# EAGLE board LRC-prod (EAGLE 5.11), part 1 of 2
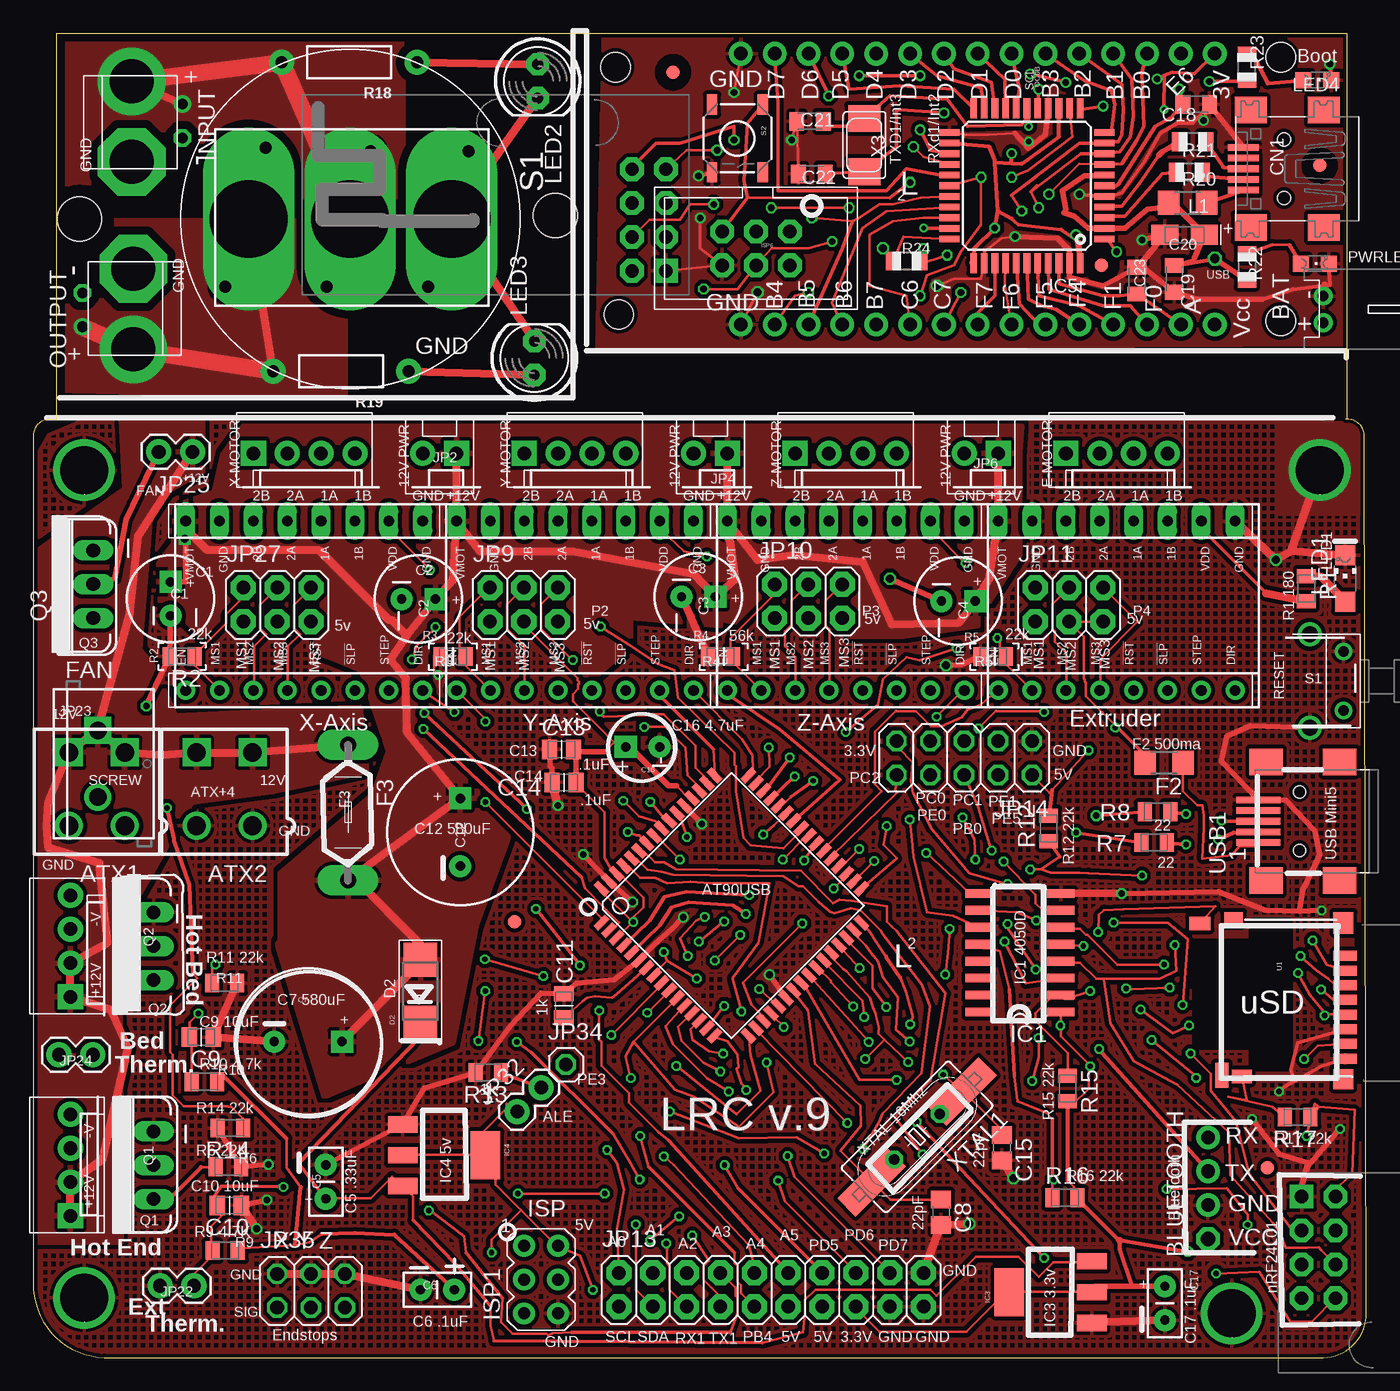
[diagram p0: board, top side]
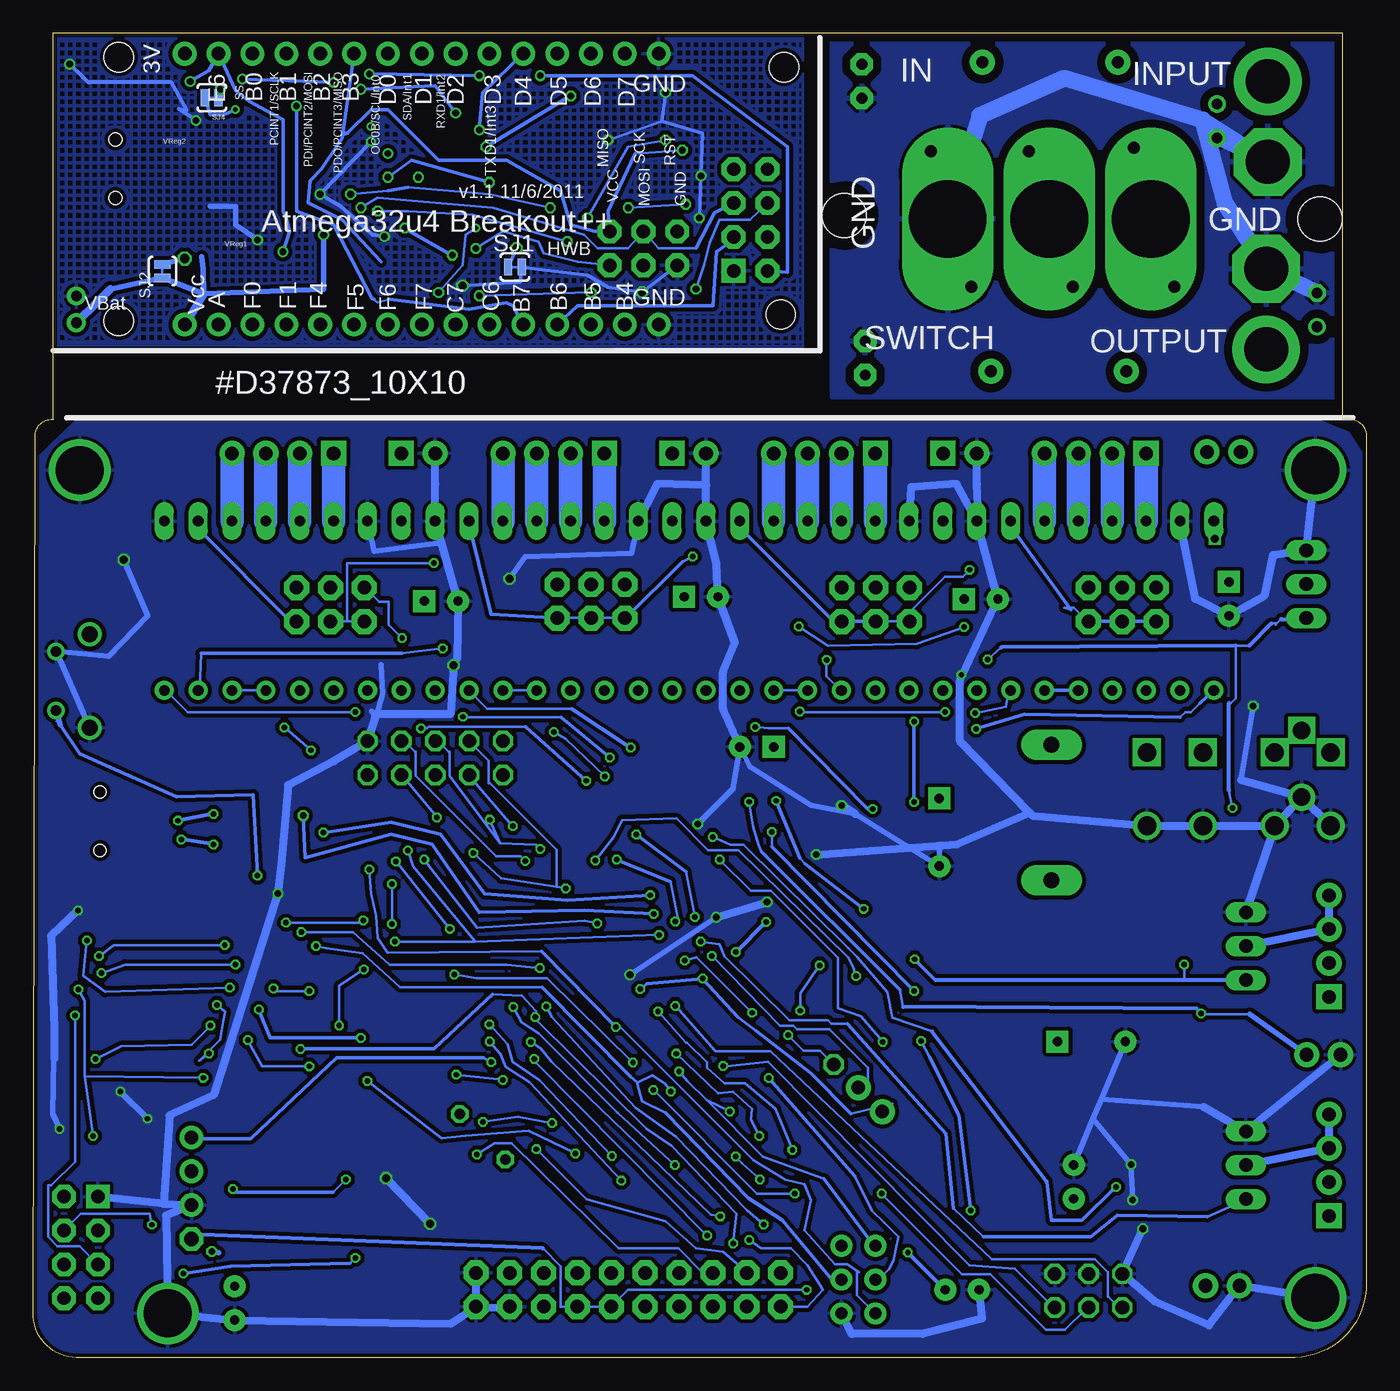
[diagram p1: board, bottom side, seen from below]

Size 100 x 99.32 mm. Coordinates in mm from the lower left corner, seen from the top.
Outline: 98.48,70.37 arc-90 99.87,69.22 100,3.06 arc-90 96.46,0.01 5.33,0.01 arc-90 0,5.6 0,69.1 arc-90 1.14,70.37
Outline: 1.14,70.37 1.77,70.37 1.77,99.32 98.54,99.32 98.54,70.37
Copper layers (1*16): Top 0.035mm / dielectric 1.5mm / Bottom 0.035mm
Design rules "Fusion_eagle_rule_v1.1": minimum track width 6mil, minimum drill 12mil, track to track 6mil, track to pad 6mil, pad to pad 6mil, via to via 6mil, smd to smd 0mil, copper to edge 10mil, drill to drill 10mil, minimum pad ring 10mil, minimum via ring 6mil, stop-mask expansion 2mil, vias tented up to drill 100mil, thermal gap 10mil
Holes 2.2 mm at 93.59,77.74 93.59,97.53 43.93,78.24 43.68,96.78

## Footprints (pad centres in the part's own frame; a part is rotated, then mirrored left to right if it is on the bottom)
MINIFITJR-4-VERTICAL = drill 1.4 round: 1 2.1,-2.75; 2 -2.1,-2.75 | drill 1.4 square: 3 2.1,2.75; 4 -2.1,2.75
JST-PH-2-THM-RA = drill 0.8 pad 1.422 round: 1 1,0; 2 -1,0
BLUETOOTH-BREAKOUT1X04 = drill 1.016 pad 1.778 round: GND 0,-1.27; RX 0,3.81; TX 0,1.27 | drill 1.1 pad 1.778 octagon: VCC 0,-3.81
CPOL-RADIAL-100UF-25V = drill 0.7 pad 1.651 square: 1 1.27,0 | drill 0.7 pad 1.651 round: 2 -1.27,0
CAP-PTH-SMALL2 = drill 0.7 pad 1.651 round: 1 0,0; 2 2.54,0
CPOL-RADIAL-1000UF-25V = drill 0.7 pad 1.651 square: 1 2.54,0 | drill 0.7 pad 1.651 round: 2 -2.54,0
C805 = smd 1.3 x 1.5: 1 -0.95,0; 2 0.95,0
CAPC2012X145AN = smd 1.15 x 1.45: 1 -0.9,0; 2 0.9,0
CPOL-RADIAL-10UF-25V = drill 0.7 pad 1.651 square: 1 1.27,0 | drill 0.7 pad 1.651 round: 2 -1.27,0
C0805K = smd 1.1 x 1.4: 1 -1,0; 2 1,0
A/3216-18R = smd 2.007 x 1.5: + 1.502,0 | smd 2.025 x 1.5: - -1.451,0
USB-MINIB = smd 0.5 x 2.308: D+ 0,4.064; D- -0.8,4.064; GND 1.6,4.064; ID 0.8,4.064; VBUS -1.6,4.064 | smd 2 x 2.4: GND1 -4.4,-2; GND2 -4.4,3.5; GND3 4.4,3.5; GND4 4.4,-2 | hole 1: -2.2,1; 2.2,1
SMADIODE = smd 2.54 x 2.54: A 2.349,0; C -2.349,0
R1206 = smd 1.6 x 1.803: 1 -1.422,0; 2 1.422,0
LITTLEFUSE = drill 1.2 pad 2.3 long: 1 -5.08,0; 2 5.08,0
SO16 = smd 0.66 x 2.032: 1 -4.445,-3.073; 2 -3.175,-3.073; 3 -1.905,-3.073; 4 -0.635,-3.073; 5 0.635,-3.073; 6 1.905,-3.073; 7 3.175,-3.073; 8 4.445,-3.073; 9 4.445,3.073; 10 3.175,3.073; 11 1.905,3.073; 12 0.635,3.073; 13 -0.635,3.073; 14 -1.905,3.073; 15 -3.175,3.073; 16 -4.445,3.073
TQFP64-2 = smd 1.194 x 0.508: 1 -7.8,6; 2 -7.8,5.2; 3 -7.8,4.4; 4 -7.8,3.6; 5 -7.8,2.8; 6 -7.8,2; 7 -7.8,1.2; 8 -7.8,0.4; 9 -7.8,-0.4; 10 -7.8,-1.2; 11 -7.8,-2; 12 -7.8,-2.8; 13 -7.8,-3.6; 14 -7.8,-4.4; 15 -7.8,-5.2; 16 -7.8,-6; 33 7.8,-6; 34 7.8,-5.2; 35 7.8,-4.4; 36 7.8,-3.6; 37 7.8,-2.8; 38 7.8,-2; 39 7.8,-1.2; 40 7.8,-0.4; 41 7.8,0.4; 42 7.8,1.2; 43 7.8,2; 44 7.8,2.8; 45 7.8,3.6; 46 7.8,4.4; 47 7.8,5.2; 48 7.8,6 | smd 0.508 x 1.194: 17 -6,-7.8; 18 -5.2,-7.8; 19 -4.4,-7.8; 20 -3.6,-7.8; 21 -2.8,-7.8; 22 -2,-7.8; 23 -1.2,-7.8; 24 -0.4,-7.8; 25 0.4,-7.8; 26 1.2,-7.8; 27 2,-7.8; 28 2.8,-7.8; 29 3.6,-7.8; 30 4.4,-7.8; 31 5.2,-7.8; 32 6,-7.8; 49 6,7.8; 50 5.2,7.8; 51 4.4,7.8; 52 3.6,7.8; 53 2.8,7.8; 54 2,7.8; 55 1.2,7.8; 56 0.4,7.8; 57 -0.4,7.8; 58 -1.2,7.8; 59 -2,7.8; 60 -2.8,7.8; 61 -3.6,7.8; 62 -4.4,7.8; 63 -5.2,7.8; 64 -6,7.8
SOT223 = smd 1.219 x 2.235: 1 -2.311,-3.099; 2 0,-3.099; 3 2.311,-3.099 | smd 3.6 x 2.2: 4 0,3.099
TQFP44 = smd 1.5 x 0.5: 1 -5.8,4; 2 -5.8,3.2; 3 -5.8,2.4; 4 -5.8,1.6; 5 -5.8,0.8; 6 -5.8,0; 7 -5.8,-0.8; 8 -5.8,-1.6; 9 -5.8,-2.4; 10 -5.8,-3.2; 11 -5.8,-4; 23 5.8,-4; 24 5.8,-3.2; 25 5.8,-2.4; 26 5.8,-1.6; 27 5.8,-0.8; 28 5.8,0; 29 5.8,0.8; 30 5.8,1.6; 31 5.8,2.4; 32 5.8,3.2; 33 5.8,4 | smd 0.5 x 1.5: 12 -4,-5.8; 13 -3.2,-5.8; 14 -2.4,-5.8; 15 -1.6,-5.8; 16 -0.8,-5.8; 17 0,-5.8; 18 0.8,-5.8; 19 1.6,-5.8; 20 2.4,-5.8; 21 3.2,-5.8; 22 4,-5.8; 34 4,5.8; 35 3.2,5.8; 36 2.4,5.8; 37 1.6,5.8; 38 0.8,5.8; 39 0,5.8; 40 -0.8,5.8; 41 -1.6,5.8; 42 -2.4,5.8; 43 -3.2,5.8; 44 -4,5.8
HARDWIRE-1X2-3.5MM = drill 3.302 pad 5.08 round: 2 -2.97,0 | drill 0.8 round: 3 -1.27,3.81 | drill 3.302 pad 5.08 octagon: GND 3.07,0 | drill 0.8 octagon: GND2 1.27,3.81
AVRISP = drill 0.9 pad 1.626 round: 1 -1.27,2.54; 2 1.27,2.54; 3 -1.27,0; 4 1.27,0; 5 -1.27,-2.54; 6 1.27,-2.54
ISP6 = drill 1.016 pad 1.778 octagon: 1 -2.54,-1.27; 2 -2.54,1.27; 3 0,-1.27; 4 0,1.27; 5 2.54,-1.27; 6 2.54,1.27
MOLEX-1X4 = drill 1.016 pad 1.88 square: 1 0,0 | drill 1.016 pad 1.88 round: 2 2.54,0; 3 5.08,0; 4 7.62,0
MOLEX-1X2 = drill 1.016 pad 1.88 square: 1 0,0 | drill 1.016 pad 1.88 round: 2 2.54,0
2X03 = drill 1.016 pad 1.88 octagon: 1 -2.54,-1.27; 2 -2.54,1.27; 3 0,-1.27; 4 0,1.27; 5 2.54,-1.27; 6 2.54,1.27
STAND-OFF = hole 3.302: 0,0
2X10 = drill 1.016 pad 1.88 octagon: 1 -11.43,-1.27; 2 -11.43,1.27; 3 -8.89,-1.27; 4 -8.89,1.27; 5 -6.35,-1.27; 6 -6.35,1.27; 7 -3.81,-1.27; 8 -3.81,1.27; 9 -1.27,-1.27; 10 -1.27,1.27; 11 1.27,-1.27; 12 1.27,1.27; 13 3.81,-1.27; 14 3.81,1.27; 15 6.35,-1.27; 16 6.35,1.27; 17 8.89,-1.27; 18 8.89,1.27; 19 11.43,-1.27; 20 11.43,1.27
2X05 = drill 1.016 octagon: 1 -5.08,-1.27; 2 -5.08,1.27; 3 -2.54,-1.27; 4 -2.54,1.27; 5 0,-1.27; 6 0,1.27; 7 2.54,-1.27; 8 2.54,1.27; 9 5.08,-1.27; 10 5.08,1.27
1X15-CB = drill 1.016 pad 1.778 round: 1 -17.78,0; 2 -15.24,0; 3 -12.7,0; 4 -10.16,0; 5 -7.62,0; 6 -5.08,0; 7 -2.54,0; 8 0,0; 9 2.54,0; 10 5.08,0; 11 7.62,0; 12 10.16,0; 13 12.7,0; 14 15.24,0; 15 17.78,0
1X02 = drill 1.016 pad 1.88 round: 1 0,0; 2 2.54,0
SCREWTERMINAL-5MM-2 = drill 1.3 pad 2.032 square: 1 0,0 | drill 1.3 pad 2.032 round: 2 5,0
FIDUCIAL-1X2.5 = smd 1 x 1: 1 0,0
1X01 = drill 1.016 octagon: 1 0,0
2X03' = drill 1.016 octagon: 1 -2.54,-1.27; 2 -2.54,1.27; 3 0,-1.27; 4 0,1.27; 5 2.54,-1.27; 6 2.54,1.27
CHIPLED_1206 = smd 1.5 x 1.5: A 0,-1.75; C 0,1.75
LED5MM = drill 0.813 pad 1.676 octagon: A -1.27,0; K 1.27,0
CHIPLED_0805 = smd 1.2 x 1.2: A 0,-1.05; C 0,1.05
POLOLU-ALLEGRO-PTH = drill 0.8 pad 1.422 long: 1A 6.35,-1.27; 1B 6.35,-3.81; 2A 6.35,1.27; 2B 6.35,3.81; GNDMOT 6.35,6.35; GNDVDD 6.35,-8.89; VDD 6.35,-6.35; VMOT 6.35,8.89 | drill 0.8 pad 1.422 round: !EN -6.35,8.89; !RST -6.35,-1.27; !SLP -6.35,-3.81; DIR -6.35,-8.89; MS1 -6.35,6.35; MS2 -6.35,3.81; MS3 -6.35,1.27; STEP -6.35,-6.35
TO220V = drill 1.016 long: 1 -2.54,0; 2 0,0; 3 2.54,0
RESC2012X70N = smd 1.05 x 1.4: 1 -0.95,0; 2 0.95,0
AXIAL-0.4 = drill 0.9 pad 1.88 round: P$1 -5.08,0; P$2 5.08,0
R0805 = smd 1.1 x 1.4: 1 -1,0; 2 1,0
NRF24L01-BREAKOUT-ITEAD = drill 1 pad 1.778 octagon: CE 13.306,-3.056; CSN 10.766,-3.056; IRQ 10.766,2.024; MISO 13.306,2.024; MOSI 10.766,-0.516; SCK 13.306,-0.516; VCC 10.766,-5.596 | drill 1 pad 1.778 square: GND 13.306,-5.596
SWITCH-SPDT-AUTO = drill 5.842 long: 1 0,0; 2 0,-7.62; GND 0,7.62 | drill 0.9 round: 1.1 -5.08,1.524; 1.2 5.08,-1.778; 2.1 -5.334,-6.35; 2.2 5.08,-9.398; GND.1 -5.08,8.89; GND.2 5.08,5.842
TACTILE_SWITCH_SMD = smd 1.524 x 0.762: 1 -2.54,1.905; 2 2.54,1.905; 3 -2.54,-1.905; 4 2.54,-1.905
SJ_2S-TRACE = smd 0.635 x 1.27: 1 -0.508,0; 2 0.508,0
USD-SOCKET-PP = smd 0.75 x 1.75: 1-DAT2 7.65,-0.9; 2-CD 6.55,-0.9; 3-CMD 5.45,-0.9; 4-VDD 4.35,-0.9; 5-CLK 3.25,-0.9; 6-VSS 2.15,-0.9; 7-DAT0 1.05,-0.9; 8-DAT1 -0.05,-0.9 | smd 1 x 1.5: CD1 -1.4,6.85 | smd 1 x 1.6: CD2 10.075,10 | smd 1 x 1.4: GND1 10.425,7.475 | smd 1.6 x 1.5: GND2 10.125,-0.775 | smd 1.5 x 1.5: P$1 -1.6,-0.75 | smd 1.85 x 1: P$2 -1.3,8.35
FIDUCIAL_1MM = smd 1 x 1: 1 0,0
PLATEDSCREW = drill 3.6 round: GND 0,0
FSMRACD = drill 1.2 round: GND1 0,3.81; GND2 6.985,3.81 | drill 0.8 round: P$1 1.27,1.27; P$2 5.715,1.27
CONN_USB_MINI-B = smd 2 x 2.5: BODY@1 -4.45,2.5; BODY@2 4.45,2.5; BODY@3 4.45,-3; BODY@4 -4.45,-3 | smd 0.5 x 3.3: D+ 0,3.1; D- -0.8,3.1; GND 1.6,3.1; ID 0.8,3.1; VUSB -1.6,3.1 | hole 0.9: -2.2,0; 2.2,0
NX5032 = smd 2 x 2.4: P$1 2,0; P$2 -2,0
HC-49U-OR-DIP = smd 5.334 x 1.93: 1 -4.826,0; 2 4.826,0 | drill 0.8 octagon: P$1 -2.413,0; P$2 2.413,0

## Placement (x,y rotation side)
ATX1  ATX-4VERTICAL  [MINIFITJR-4-VERTICAL]  4.77,42.64 0 top
ATX2  ATX-4VERTICAL  [MINIFITJR-4-VERTICAL]  14.35,42.64 0 top
BAT  [JST-PH-2-THM-RA]  96.77,78.62 270 top
BLUETOOTH  [BLUETOOTH-BREAKOUT1X04]  88.13,12.71 0 top
C1  100uf  [CPOL-RADIAL-100UF-25V]  10.3,56.91 90 top
C2  100uf  [CPOL-RADIAL-100UF-25V]  28.9,56.89 0 top
C3  100uf  [CPOL-RADIAL-100UF-25V]  49.9,57.07 0 top
C4  100uf  [CPOL-RADIAL-100UF-25V]  69.4,56.75 0 top
C5  0.33uF  [CAP-PTH-SMALL2]  21.95,11.92 90 top
C6  0.1uF  [CAP-PTH-SMALL2]  31.58,5.09 180 top
C7  580uF  [CPOL-RADIAL-1000UF-25V]  20.61,23.7 0 top
C8  22pf  [C805]  68.11,10.9 270 top
C9  10uF  [CAPC2012X145AN]  12.61,24.04 180 top
C10  10uF  [CAPC2012X145AN]  14.72,11.42 180 top
C11  1uf  [CAPC2012X145AN]  39.81,26.39 270 top
C12  580uF  [CPOL-RADIAL-1000UF-25V]  32.03,39.4 90 top
C13  0.1uF  [CAPC2012X145AN]  39.63,45.61 0 top
C14  0.1uF  [CAPC2012X145AN]  39.82,43.14 180 top
C15  22pf  [C805]  72.68,15.74 270 top
C16  4.7uF  [CPOL-RADIAL-10UF-25V]  45.72,45.81 180 top
C17  0.1uF  [CAP-PTH-SMALL2]  84.89,5.35 270 top
C18  0.1uF  [C0805K]  87.24,93.99 0 top
C19  0.1uF  [C0805K]  85.59,80.91 270 top
C20  10uF  [A/3216-18R]  86.35,84.21 0 top
C21  22pF  [C0805K]  58.29,92.72 180 top
C22  22pF  [C0805K]  58.41,88.78 180 top
C23  0.1uF  [C0805K]  82.8,80.78 90 top
CN1  MiniB USB  [USB-MINIB]  94.84,89.16 90 top
D2  [SMADIODE]  29.04,27.48 90 top
F2  500ma  [R1206]  84.83,44.62 180 top
F3  8A  [LITTLEFUSE]  23.61,40.88 270 top
IC1  4050D  [SO16]  74.03,30.37 90 top
IC2  AT90USB1286  [TQFP64-2]  52.38,33.9 45 top
IC3  3.3v  [SOT223]  76.31,4.91 90 top
IC4  5v  [SOT223]  30.82,15.18 270 top
IC5  ATMEGA32U4-AU  [TQFP44]  74.54,87.89 180 top
INPUT  HARDWIRE-3.5MM  [HARDWIRE-1X2-3.5MM]  7.38,92.75 270 top
ISP1  AVRISP-6  [AVRISP]  38.09,5.85 0 top
ISP6  PINHD-2X3THM  [ISP6]  54.22,83.19 180 top
JP1  MOT-X  [MOLEX-1X4]  16.51,67.83 0 top
JP2  12VPWR  [MOLEX-1X2]  31.75,67.83 180 top
JP3  MOT-Y  [MOLEX-1X4]  36.83,67.83 0 top
JP4  12VPWR  [MOLEX-1X2]  52.07,67.83 180 top
JP5  MOT-Z  [MOLEX-1X4]  57.15,67.83 0 top
JP6  12VPWR  [MOLEX-1X2]  72.39,67.83 180 top
JP7  MOT-E  [MOLEX-1X4]  77.47,67.83 0 top
JP8  HOTEND  [MOLEX-1X4]  2.79,10.62 90 top
JP9  [2X03]  36.8,56.47 0 top
JP10  [2X03]  58.15,56.73 0 top
JP11  [2X03]  77.71,56.47 0 top
JP12  STAND-OFF  [STAND-OFF]  3.47,85.4 0 top
JP13  [2X10]  55.36,5.09 0 top
JP14  [2X05]  69.84,44.97 180 top
JP15  STAND-OFF  [STAND-OFF]  39.16,85.66 0 top
JP16  Breakout 1  [1X15-CB]  70.86,97.8 0 top
JP17  Breakout 2  [1X15-CB]  70.86,77.48 180 top
JP21  HOTBED  [MOLEX-1X4]  2.79,27.05 90 top
JP22  E-THERM  [1X02]  12.05,5.39 180 top
JP23  SCREW  [SCREWTERMINAL-5MM-2]  4.84,47.04 270 top
JP24  B-THERM  [1X02]  4.46,22.71 180 top
JP25  FAN  [1X02]  11.95,67.94 180 top
JP26  FIDUCIAL1X2.5  [FIDUCIAL-1X2.5]  36.09,32.7 0 top
JP27  [2X03]  18.3,56.47 0 top
JP32  ALE  [1X02]  36.3,18.45 45 top
JP33  FIDUCIAL1X2.5  [FIDUCIAL-1X2.5]  92.58,14.23 0 top
JP34  [1X01]  39.96,21.98 0 top
JP35  [2X03']  20.83,5.02 0 top
L1  500mA  [R1206]  86.61,86.62 180 top
LED1  [CHIPLED_1206]  98.42,58.44 0 top
LED2  [LED5MM]  37.84,95.73 270 top
LED3  [LED5MM]  37.59,74.97 90 top
LED4  RED  [CHIPLED_0805]  96.35,95.82 270 top
OUTPUT  HARDWIRE-3.5MM  [HARDWIRE-1X2-3.5MM]  7.51,78.59 90 top
P1  POLOLU-X  [POLOLU-ALLEGRO-PTH]  20.32,56.4 90 top
P2  POLOLU-Y  [POLOLU-ALLEGRO-PTH]  40.64,56.4 90 top
P3  POLOLU-Z  [POLOLU-ALLEGRO-PTH]  60.96,56.4 90 top
P4  POLOLU-E  [POLOLU-ALLEGRO-PTH]  81.28,56.4 90 top
PWRLED  GREEN  [CHIPLED_0805]  96.13,82.05 270 top
Q1  RFP30N06LE  [TO220V]  9.03,14.43 90 top
Q2  RFP30N06LE  [TO220V]  9.03,30.86 90 top
Q3  RFP30N06LE  [TO220V]  4.49,58.01 90 top
R1  180  [RESC2012X70N]  95.51,57.67 270 top
R2  22k  [RESC2012X70N]  11.17,52.59 180 top
R3  22k  [RESC2012X70N]  31.5,52.59 180 top
R4  22k  [RESC2012X70N]  51.56,52.59 180 top
R5  22k  [RESC2012X70N]  72.01,52.59 180 top
R6  22k  [RESC2012X70N]  14.64,14.31 0 top
R7  22  [RESC2012X70N]  84.08,38.62 180 top
R8  22  [RESC2012X70N]  84.34,40.94 180 top
R9  4.7k  [RESC2012X70N]  14.39,8.02 0 top
R10  4.7k  [RESC2012X70N]  12.84,20.7 0 top
R11  22k  [RESC2012X70N]  14.35,28.09 0 top
R12  22k  [RESC2012X70N]  76.18,39.69 90 top
R13  1k  [RESC2012X70N]  34.14,21.37 180 top
R14  22k  [RESC2012X70N]  14.78,17.22 180 top
R15  22K  [RESC2012X70N]  77.6,20.17 270 top
R16  22K  [RESC2012X70N]  77.39,11.99 0 top
R17  22K  [RESC2012X70N]  94.86,18.04 180 top
R18  [AXIAL-0.4]  23.7,97.15 180 top
R19  [AXIAL-0.4]  23.08,73.97 180 top
R20  22  [R0805]  86.73,88.91 180 top
R21  22  [R0805]  86.99,91.19 180 top
R22  80  [R0805]  91.05,81.8 270 top
R23  80  [R0805]  91.05,96.78 90 top
R24  10K  [R0805]  65.52,82.25 0 top
RF1  NRF24L01-BREAKOUT  [NRF24L01-BREAKOUT-ITEAD]  108.46,6.48 180 top
RF2  [NRF24L01-BREAKOUT-ITEAD]  34.16,87.11 0 top
S1  [SWITCH-SPDT-AUTO]  23.78,85.4 270 top
S2  [TACTILE_SWITCH_SMD]  52.82,91.45 270 top
SJ1  HWB  [SJ_2S-TRACE]  63.87,81.8 0 bottom
SJ2  VCC  [SJ_2S-TRACE]  90.32,81.49 90 bottom
SJ4  VCC  [SJ_2S-TRACE]  86.61,94.5 180 bottom
U1  USD-SOCKETUSD  [USD-SOCKET-PP]  97.52,22.48 90 top
U$1  FIDUCIAL  [FIDUCIAL_1MM]  48,96.4 180 top
U$2  FIDUCIAL  [FIDUCIAL_1MM]  96.51,89.42 180 top
U$3  [L2LOGO]  65.73,88.38 180 top
U$6  FIDUCIAL  [FIDUCIAL_1MM]  80.13,81.92 180 top
U$8  PLATED-SCREW  [PLATEDSCREW]  89.91,3.31 0 top
U$9  FSMRACD  [FSMRACD]  99.56,47.25 90 top
U$11  [L2LOGO]  65.27,29.85 0 top
U$17  PLATED-SCREW  [PLATEDSCREW]  3.81,4.49 0 top
U$24  PLATED-SCREW  [PLATEDSCREW]  96.52,66.56 0 top
U$37  PLATED-SCREW  [PLATEDSCREW]  3.81,66.56 0 top
USB1  CON-USB-MINI-BUSB1  [CONN_USB_MINI-B]  94.99,40.23 90 top
X3  16MHz  [NX5032]  62.35,90.94 270 top
XTAL1  16.000MHZ  [HC-49U-OR-DIP]  66.3,16.56 225 top

## Library data of the parts
ATX1 ATX2 = atx-power-supply
BAT C18 C19 C21-C23 CN1 D2 F2 ISP1 JP16 JP17 L1 LED2-LED4 PWRLED R20-R24 U$1 U$2 U$6 = adafruit
BLUETOOTH C20 IC3 IC4 INPUT OUTPUT S1 U1 U$3 U$9 U$11 XTAL1 = LL
C1-C7 C12 C16 C17 JP1-JP13 JP15 JP21-JP27 JP32 JP33 Q1-Q3 R18 R19 S2 SJ1 SJ2 SJ4 = SparkFun
C8 C15 USB1 = dp_devices
C9-C11 C13 C14 = ipc-7351-capacitor
F3 = RepRapjr
IC1 = 40xx
IC2 = Atmel-at90usb-teensy
IC5 ISP6 X3 = adaprog
JP14 JP34 JP35 = pinhead
LED1 = led
P1-P4 = pololu-allegro
R1-R17 = ipc-7351-resistor
RF1 RF2 = LL; FREQ: 2.4GHZ
U$8 U$17 U$24 U$37 = Sanguinololu

## Nets
3.3V: C17.1 IC1.1 IC3.2 IC3.4 JP13.15 JP14.9 R15.2 R16.2 R17.1 RF1.VCC U1.4-VDD
5V: BLUETOOTH.VCC C6.1 C13.2 C14.1 C16.1 F2.2 IC2.3 IC2.8 IC2.21 IC2.52 IC2.62 IC2.64 IC4.2 IC4.4 ISP1.2 JP9.1 JP9.3 JP9.5 JP10.1 JP10.3 JP10.5 JP11.1 JP11.3 JP11.5 JP13.11 JP13.13 JP14.2 JP27.1 JP27.3 JP27.5 JP32.1 P1.VDD P2.VDD P3.VDD P4.VDD R1.2 R9.2 R10.2 R12.2
12V: ATX1.3 ATX1.4 ATX2.3 ATX2.4 F3.1 JP8.1 JP8.2 JP21.1 JP21.2 JP23.1 JP25.1
!E-ENABLE: IC2.38 P4.!EN
!HOTBED: IC2.39 Q2.1 R11.1
!HOTEND: IC2.40 Q1.1 R6.1
!PWM-FAN: IC2.41 Q3.1 R14.1
!RESET: IC2.20 ISP1.5 R12.1 U$9.P$1
!X-ENABLE: IC2.2 P1.!EN
!Y-ENABLE: IC2.1 P2.!EN
!Z-ENABLE: IC2.42 P3.!EN
+3V3: JP16.15 RF2.VCC SJ4.2
+5V: C19.1 C20.+ IC5.2 IC5.7 L1.2 R22.2 SJ2.2
A0: IC2.61 JP13.2
A1: IC2.60 JP13.4
A2: IC2.59 JP13.6
A3: IC2.58 JP13.8
A4: IC2.57 JP13.10
A5: IC2.56 JP13.12
ALE: IC2.43 JP32.2 R13.1
AREF: C23.1 IC5.42 JP17.2
B-THERM: C9.2 IC2.55 JP24.1 R10.1
E-DIR: IC2.44 P4.DIR
E-MOT-1A [power]: JP7.3 P4.1A
E-MOT-1B [power]: JP7.4 P4.1B
E-MOT-2A [power]: JP7.2 P4.2A
E-MOT-2B [power]: JP7.1 P4.2B
E-MS1: JP11.2 P4.MS1 R5.1
E-MS2: JP11.4 P4.MS2
E-MS3: JP11.6 P4.MS3
E-RESETSLEEP: P4.!RST P4.!SLP
E-STEP: IC2.45 P4.STEP
E-THERM: C10.2 IC2.54 JP22.1 R9.1
GND [power]: ATX1.1 ATX1.2 ATX2.1 ATX2.2 BLUETOOTH.GND C1.2 C2.2 C3.2 C4.2 C5.2 C6.2 C7.2 C8.2 C9.1 C10.1 C11.1 C12.2 C13.1 C14.2 C15.2 C16.2 C17.2 IC1.8 IC2.6 IC2.22 IC2.53 IC2.63 IC3.1 IC4.1 ISP1.6 JP2.2 JP4.2 JP6.2 JP13.17 JP13.19 JP13.20 JP14.1 JP22.2 JP23.2 JP24.2 JP35.2 JP35.4 JP35.6 LED1.C P1.GNDMOT P1.GNDVDD P2.GNDMOT P2.GNDVDD P3.GNDMOT P3.GNDVDD P4.GNDMOT P4.GNDVDD Q1.3 Q2.3 Q3.3 R2.2 R3.2 R4.2 R5.2 R6.2 R11.2 R13.2 R14.2 RF1.GND U1.6-VSS U1.8-DAT1 U$8.GND U$9.GND1 U$9.P$2 U$17.GND U$24.GND U$37.GND USB1.GND
GND1: INPUT.GND INPUT.GND2 LED2.K LED3.K OUTPUT.GND OUTPUT.GND2 S1.GND
GND2: BAT.2 C18.2 C19.2 C20.- C21.2 C22.2 C23.2 CN1.GND IC5.5 IC5.15 IC5.23 IC5.35 IC5.43 ISP6.6 JP16.1 JP17.15 LED4.C PWRLED.C RF2.GND S2.4 SJ1.2
HOTBED-GND [power]: JP21.3 JP21.4 Q2.2
HOTEND-GND [power]: JP8.3 JP8.4 Q1.2
HWB: IC5.33 R24.1 SJ1.1
MISO: IC2.13 ISP1.1 U1.7-DAT0
MISO1: IC5.11 ISP6.1 JP16.10 RF2.MISO
MOSI: IC1.5 IC2.12 ISP1.4
MOSI1: IC5.10 ISP6.4 JP16.11 RF2.MOSI
N$1: LED1.A R1.1
N$2: R7.1 USB1.D-
N$3: IC2.4 R7.2
N$4: IC2.5 R8.2
N$5: R8.1 USB1.D+
N$6: JP25.2 Q3.2
N$7: IC2.9 JP34.1
N$8: F2.1 USB1.VUSB
N$9: C11.2 IC2.7
N$10: R17.2 U1.CD1
N$11: IC1.12 R16.1 RF1.CSN
N$12: IC1.2 R15.1 U1.2-CD
N$13: IC1.4 RF1.MOSI U1.3-CMD
N$14: IC1.10 RF1.CE
N$15: LED3.A R19.P$1
N$16: C5.1 D2.C IC3.3 IC4.3
N$17: IC1.6 RF1.SCK U1.5-CLK
N$18: LED2.A R18.P$1
N$19: IC5.3 R20.2
N$20: IC5.4 R21.2
N$21: C22.1 IC5.16 X3.P$1
N$22: C21.1 IC5.17 X3.P$2
N$23: PWRLED.A R22.1
N$24: CN1.D+ R21.1
N$25: CN1.D- R20.1
N$26: LED4.A R23.2
N$27: C18.1 IC5.6 SJ4.1
NRF-IRQ: IC2.18 RF1.IRQ
PB0: IC5.8 JP16.13 RF2.CSN
PB0-SD-SS: IC1.3 IC2.10 JP14.6
PB1: IC5.28 JP17.14
PB4: IC2.14 JP13.9
PB5: IC5.29 JP17.13 RF2.IRQ
PB6: IC5.30 JP17.12 RF2.CE
PB7: IC5.12 JP17.11
PC0-NRF-CE: IC1.9 IC2.35 JP14.7
PC1-NRF-CSN: IC1.11 IC2.36 JP14.5
PC2: IC2.37 JP14.10
PC6: IC5.31 JP17.10
PC7: IC5.32 JP17.9
PD0: IC5.18 JP16.9
PD0-SCL: IC2.25 JP13.1
PD1: IC5.27 JP16.2
PD1-SDA: IC2.26 JP13.3
PD2: IC5.26 JP16.3
PD2-RX1: BLUETOOTH.TX IC2.27 JP13.5
PD3: IC5.22 JP16.4
PD3-TX1: BLUETOOTH.RX IC2.28 JP13.7
PD4: IC5.25 JP16.5
PD4-SD-CD: IC2.29 U1.CD2
PD5: IC2.30 JP13.14
PD6: IC2.31 JP13.16
PD7: IC2.32 JP13.18
PD8: IC5.21 JP16.6
PD9: IC5.20 JP16.7
PD10: IC5.19 JP16.8
PE0: IC2.33 JP14.8
PE1: IC2.34 JP14.3
PE5: IC2.19 JP14.4
PE6: IC5.1 JP16.14 R23.1
PF0: IC5.41 JP17.3
PF1: IC5.40 JP17.4
PF4: IC5.39 JP17.5
PF5: IC5.38 JP17.6
PF6: IC5.37 JP17.7
PF7: IC5.36 JP17.8
RST: IC5.13 ISP6.5 S2.1
SCK: IC5.9 ISP6.3 JP16.12 RF2.SCK
SCLK: IC1.7 IC2.11 ISP1.3
VBUS: CN1.VBUS L1.1
VCC: C1.1 C2.1 C3.1 C4.1 C7.1 C12.1 D2.A F3.2 JP2.1 JP4.1 JP6.1 P1.VMOT P2.VMOT P3.VMOT P4.VMOT
VCC1: BAT.1 IC5.14 IC5.24 IC5.34 IC5.44 ISP6.2 JP17.1 R24.2 SJ2.1
VIN: INPUT.2 INPUT.3 R18.P$2 S1.1
VOUT: OUTPUT.2 OUTPUT.3 R19.P$2 S1.2
X-DIR: IC2.50 P1.DIR
X-MOT-1A [power]: JP1.3 P1.1A
X-MOT-1B [power]: JP1.4 P1.1B
X-MOT-2A [power]: JP1.2 P1.2A
X-MOT-2B [power]: JP1.1 P1.2B
X-MS1: JP27.2 P1.MS1 R2.1
X-MS2: JP27.4 P1.MS2
X-MS3: JP27.6 P1.MS3
X-RESETSLEEP: P1.!RST P1.!SLP
X-STEP: IC2.51 P1.STEP
X-STOP: IC2.15 JP35.1
XTAL1: C15.1 IC2.24 XTAL1.1
XTAL2: C8.1 IC2.23 XTAL1.2
Y-DIR: IC2.48 P2.DIR
Y-MOT-1A [power]: JP3.3 P2.1A
Y-MOT-1B [power]: JP3.4 P2.1B
Y-MOT-2A [power]: JP3.2 P2.2A
Y-MOT-2B [power]: JP3.1 P2.2B
Y-MS1: JP9.2 P2.MS1 R3.1
Y-MS2: JP9.4 P2.MS2
Y-MS3: JP9.6 P2.MS3
Y-RESETSLEEP: P2.!RST P2.!SLP
Y-STEP: IC2.49 P2.STEP
Y-STOP: IC2.16 JP35.3
Z-DIR: IC2.46 P3.DIR
Z-MOT-1A [power]: JP5.3 P3.1A
Z-MOT-1B [power]: JP5.4 P3.1B
Z-MOT-2A [power]: JP5.2 P3.2A
Z-MOT-2B [power]: JP5.1 P3.2B
Z-MS1: JP10.2 P3.MS1 R4.1
Z-MS2: JP10.4 P3.MS2
Z-MS3: JP10.6 P3.MS3
Z-RESETSLEEP: P3.!RST P3.!SLP
Z-STEP: IC2.47 P3.STEP
Z-STOP: IC2.17 JP35.5